# Altium PCB BalanceCar_pcb.PcbDoc (part 1 of 2)
Units mil, origin at the board's own origin, x right, y up, seen from the top; angles counter-clockwise.
Board outline 4685.52 x 2519.84 mil, 2 copper layers (Top Layer, Bottom Layer); 150 components, 131 nets, 624 pads, 420 vias.
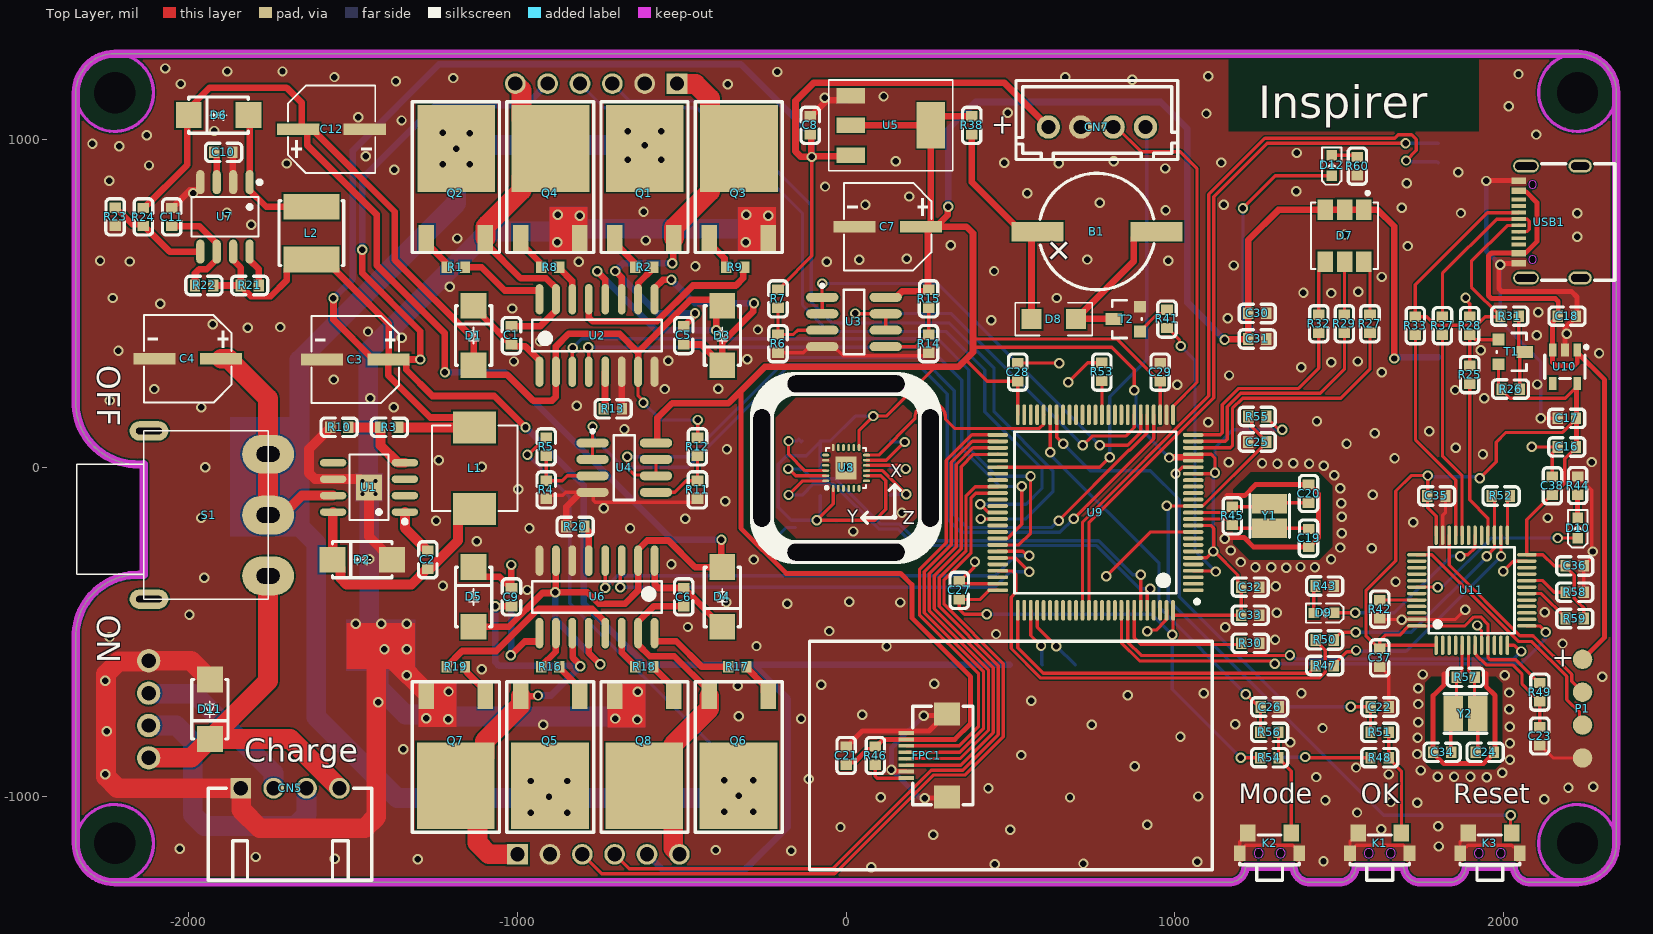
[diagram p0: Top Layer view]
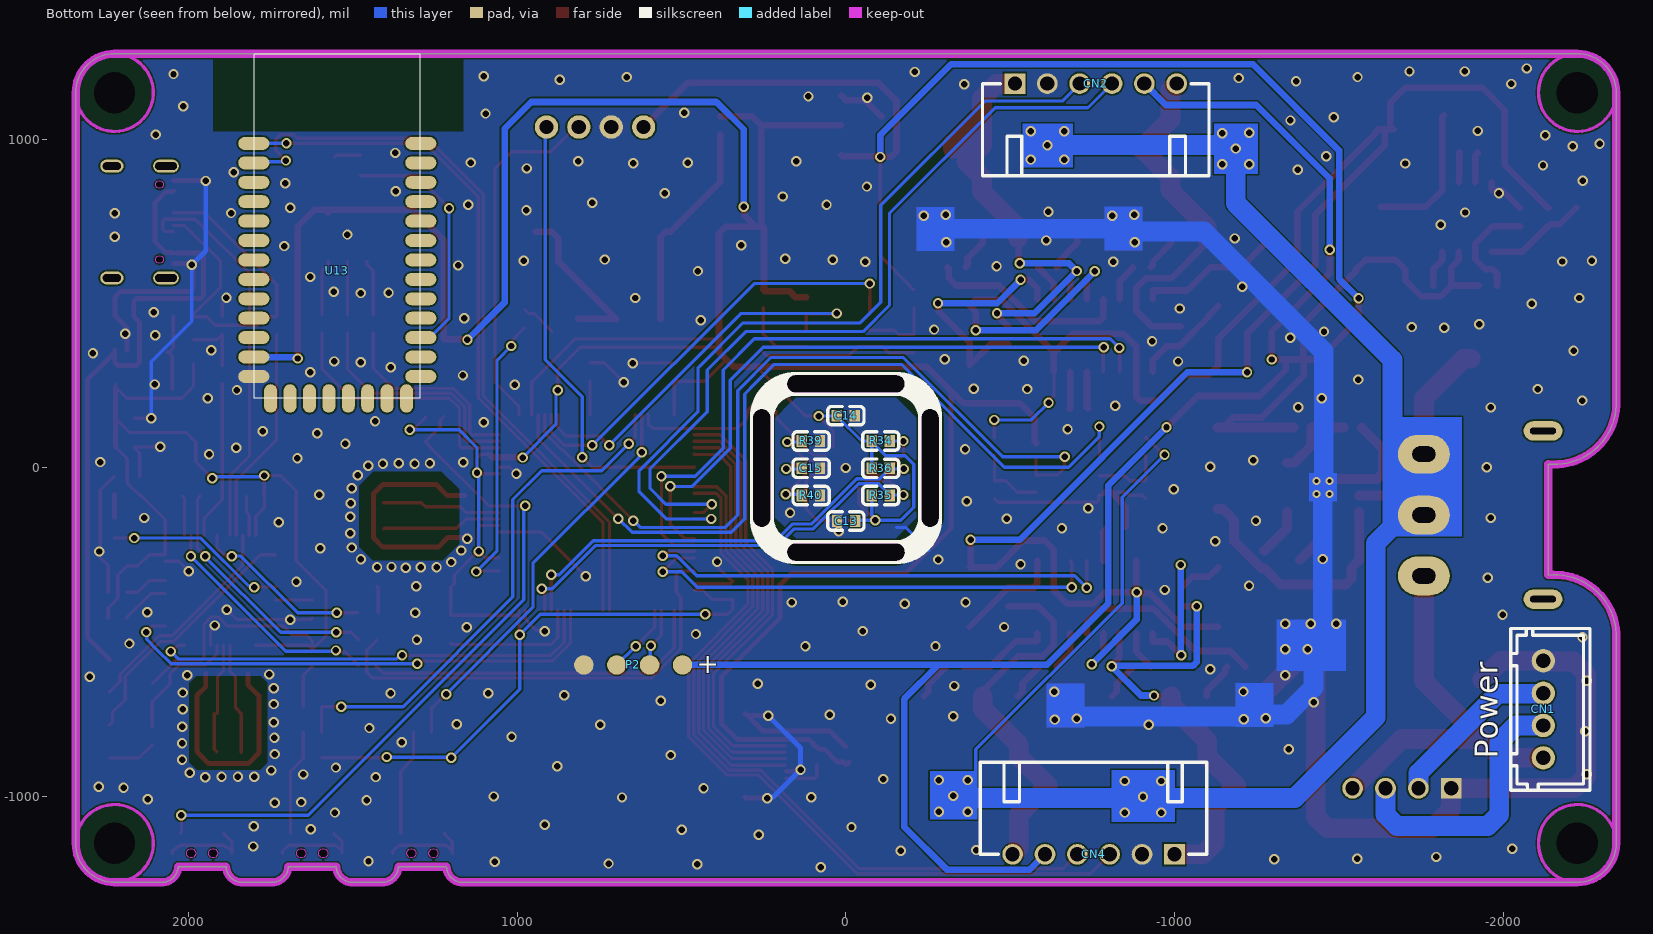
[diagram p1: Bottom Layer view, seen from below]

## Layer stack, top to bottom
Top Solder: solder mask 0.4, Solder Resist, Dk 3.5
Top Layer: signal copper 1.4
Dielectric 1: dielectric 12.6, FR-4, Dk 4.8
Bottom Layer: signal copper 1.4
Bottom Solder: solder mask 0.4, Solder Resist, Dk 3.5

## Board outline
-2342.52,-1141.73 ccw(c-2224.41,-1141.73) -2224.41,-1259.84 1162.84,-1259.84 1163,-1260 ccw(c1166,-1211) 1215.05,-1213.02 1215,-1213.02 1361,-1213.02 1360.95,-1213.02 ccw(c1410,-1211) 1413,-1260 1498,-1260 ccw(c1501,-1211) 1550.05,-1213.02 1550,-1213.02 1696,-1213.02 1695.95,-1213.02 ccw(c1745,-1211) 1748,-1260 1833,-1260 ccw(c1836,-1211) 1885.05,-1213.02 1885,-1213.02 2031,-1213.02 2030.95,-1213.02 ccw(c2080,-1211) 2083,-1260 2224.41,-1260 2224.41,-1259.84 ccw(c2224.41,-1141.73) 2342.52,-1141.73 2342.52,1141.73 ccw(c2224.41,1141.73) 2224.41,1259.84 -2224.41,1259.84 ccw(c-2224.41,1141.73) -2342.52,1141.73 -2342.52,190 -2343,190 ccw(c-2155,199) -2136.23,11.72 -2136.16,11 -2136.16,-325 -2136.23,-325.72 ccw(c-2155,-513) -2343,-504 -2342.52,-498.48
cut-out: -152.56,224.41 cw(c-152.56,255.91) -152.56,287.4 152.56,287.4 cw(c152.56,255.91) 152.56,224.41 151.57,224.41
cut-out: 224.41,-152.56 ccw(c255.91,-152.56) 287.4,-152.56 287.4,152.56 ccw(c255.91,152.56) 224.41,152.56 224.41,151.57
cut-out: -152.56,-287.4 cw(c-152.56,-255.91) -152.56,-224.41 -151.57,-224.41 151.57,-224.41 152.56,-224.41 cw(c152.56,-255.91) 152.56,-287.4
cut-out: -287.4,-152.56 ccw(c-255.91,-152.56) -224.41,-152.56 -224.41,-151.57 -224.41,151.57 -224.41,152.56 ccw(c-255.91,152.56) -287.4,152.56
cut-out: -287.4,-152.56 ccw(c-255.91,-152.56) -224.41,-152.56 -224.41,-151.57 -224.41,151.57 -224.41,152.56 ccw(c-255.91,152.56) -287.4,152.56

## Design rules (kind name [scope] priority, off if disabled: settings)
Clearance Polygon [InPolygon] p1: gap=5 ignorepadtopadclearanceinfootprint=FALSE
Clearance [All] p2: gap=5 ignorepadtopadclearanceinfootprint=FALSE
HoleSize 安装孔 [All] p1: absolutevalues=TRUE maxlimit=130 minlimit=1 maxpercent=80.000 minpercent=20.000
HoleSize [IsPad] p2: absolutevalues=TRUE maxlimit=100 minlimit=1 maxpercent=80.000 minpercent=20.000
PolygonConnect PolygonConnect_1 [All] p1: connectstyle=Direct reliefconductorwidth=10 reliefentries=4 polygonreliefangle="90 Angle" airgapwidth=10
PolygonConnect via [IsVia] p2: connectstyle=Direct reliefconductorwidth=10 reliefentries=4 polygonreliefangle="90 Angle" airgapwidth=10
RoutingVias [All] p1: holewidth=19.68 width=31.5 viastyle="Through Hole" minholewidth=19.68 minwidth=31.5 maxholewidth=19.68 maxwidth=31.5
SolderMaskExpansion [All] p1: expansion=4 istentingtop=FALSE
Width Width_1 [All] p1: maxlimit=60 minlimit=10 preferedwidth=10
Width PIC5V [InNet('PIC5V')] p2: maxlimit=20 minlimit=10 preferedwidth=20
Width 3.3V [InNet('3.3V')] p3: maxlimit=30 minlimit=10 preferedwidth=30
29 further rules are at their usual default settings.

## Components (designator, comment, footprint, x,y, rotation, side; value= is the part's Value field where it differs from the comment)
B1 "GSC9045YB-16R2700" BUZ-SMD_GSC9045YB-16R2700 763,719 r90 top
C1 "1uF" 0603-JLC-C -1017.52,375.59 r180 top value=100pF
C2 "0.01uf" 0603-JLC-C -1272,-306.25 r180 top
C3 "220uF/16V" SMD,6.3X5.3MM -1492,334 r180 top
C4 "220uF/25V" SMD,6.3X5.8MM -1900.64,332 r180 top
C5 "1uF" 0603-JLC-C -493.72,375.59 r180 top value=100pF
C6 "1uF" 0603-JLC-C -493.93,-364.91 r0 top value=100pF
C7 "100uF/16V" SMD,6.3X5.3MM 127,738 r180 top
C8 "104" 0603-JLC-C -109.16,1069.31 r0 top value=0.1uf
C9 "1uF" 0603-JLC-C -1017.73,-364.91 r0 top value=100pF
C10 "100pF" 0603-JLC-C -1866,960 r270 top value=470pF
C11 "104" 0603-JLC-C -2051,790.86 r0 top value=470pF
C12 "220uF/25V" SMD,6.3X5.8MM -1666,1030 r0 top
C13 "0.01uF" 0603-JLC-C 27.25,-161.46 r90 bottom value=100pF
C14 "104" 0603-JLC-C -27.25,159.32 r270 bottom value=100pF
C15 "104" 0603-JLC-C 78.74,-0.8 r270 bottom value=100pF
C16 "1uF" 0603-JLC-C 2164.67,63.84 r90 top value=100pF
C17 "104" 0603-JLC-C 2164.67,150.84 r90 top value=100pF
C18 "1uF" 0603-JLC-C 2219.78,461.84 r270 top value=100pF
C19 "20pF" 0603-JLC-C 1406.62,-240.53 r180 top value=100pF
C20 "20pF" 0603-JLC-C 1406.4,-50.37 r0 top value=100pF
C21 "104" 0603-JLC-C 0,-847.19 r0 top value=100pF
C22 "104" 0603-JLC-C 1595.7,-727 r90 top value=100pF
C23 "104" 0603-JLC-C 2109.79,-787.89 r0 top value=100pF
C24 "20pF" 0603-JLC-C 1970.63,-864.63 r270 top value=104
C25 "104" 0603-JLC-C 1277.73,79 r270 top value=100pF
C26 "104" 0603-JLC-C 1260.7,-727 r90 top value=100pF
C27 "104" 0603-JLC-C 344,-345 r0 top value=100pF
C28 "104" 0603-JLC-C 522,319 r0 top value=100pF
C29 "104" 0603-JLC-C 955,319 r0 top value=100pF
C30 "104" 0603-JLC-C 1277.73,470.13 r270 top value=100pF
C31 "104" 0603-JLC-C 1277.73,392.38 r270 top value=100pF
C32 "104" 0603-JLC-C 1256.56,-362.26 r270 top value=100pF
C33 "104" 0603-JLC-C 1256.56,-447.63 r270 top value=100pF
C34 "20pF" 0603-JLC-C 1785.41,-864.84 r90 top value=104
C35 "104" 0603-JLC-C 1823.11,-85 r270 top value=100pF
C36 "104" 0603-JLC-C 2243.3,-297.84 r270 top value=100pF
C37 "104" 0603-JLC-C 1623.06,-605.11 r180 top value=100pF
C38 "104" 0603-JLC-C 2148,-26.89 r0 top value=100pF
CN1 "BAT_4P" CONN-TH_4P-P2.50_HX25003-4A -2121,-734 r90 bottom
CN2 "Motor1" CONN-TH_6P-P2.50_X8821WR-06S-N2SN -760,1169 r180 bottom
CN4 "Motor2" CONN-TH_6P-P2.50_X8821WR-06S-N2SN -753.06,-1175 r0 bottom
CN5 "Charge" CONN-TH_4P-P2.54_X8821WR-06S-N2SN -1841,-974 r0 top
CN7 "LiDAR" CONN-TH_4P-P2.50_HX25003-4A 763,1037 r180 top
D1 "SS34" SMA(DO-214AC) -1133,493.39 r270 top
D2 "SS34" SMA(DO-214AC) -1562,-279 r0 top
D3 "SS34" SMA(DO-214AC) -376.5,312.29 r90 top
D4 "SS34" SMA(DO-214AC) -376.5,-482.71 r90 top
D5 "SS34" SMA(DO-214AC) -1133,-301.61 r270 top
D6 "SS34" SMA(DO-214AC) -1999,1073 r0 top
D7 "RGB5050" LED-SMD_6P-L5.0-W5.0-FD 1516,706.21 r270 top
D8 "1N4148" 1206 699,453 r180 top
D9 "LED" 0603LED 1484.97,-440.72 r180 top
D10 "LED" 0603LED 2225.27,-214.11 r90 top
D11 "SMAJ15A" SMA(DO-214AC) -1935,-824.55 r90 top
D12 "LED" 0603LED 1477.28,888.48 r90 top
FPC1 "AFC24-S08FIC-00" FPC-SMD_P0.50-8P-QCHF-SM-H2.0 245.5,-874.44 r270 top
K1 "TS24CA" SW-SMD_TS24CA 1623,-1141 r180 top
K2 "TS24CA" SW-SMD_TS24CA 1288,-1141 r180 top
K3 "TS24CA" SW-SMD_TS24CA 1958,-1141 r180 top
L1 "15UH" IND-SMD_L7.1-W6.6 -1130,-1 r90 top
L2 "150uH" IND-SMD_L5.0-W5.0_SMNR5040 -1626,714 r90 top value=100uH
P1 "ST_SWD" HDR1X4 2240,-882 r90 top
P2 "ISP" HDR1X4 797,-599 r180 bottom
Q1 "RU3560L" TO-252-3L -613.19,835.84 r0 top
Q2 "RU3560L" TO-252-3L -1186.52,835.84 r0 top
Q3 "RU3560L" TO-252-3L -326.52,835.84 r0 top
Q4 "RU3560L" TO-252-3L -899.85,835.84 r0 top
Q5 "RU3560L" TO-252-3L -899.85,-830.16 r180 top
Q6 "RU3560L" TO-252-3L -326.52,-830.16 r180 top
Q7 "RU3560L" TO-252-3L -1186.52,-830.16 r180 top
Q8 "RU3560L" TO-252-3L -613.19,-830.16 r180 top
R1 "33R" 0603-RMOS -1214.07,610 r90 top value=1K
R2 "33R" 0603-RMOS -585.63,610 r270 top value=1K
R3 "10k" 0603-JLC-R -1416.27,123.52 r90 top
R4 "1K" 0603-JLC-R -912,-94 r180 top
R5 "10K" 0603-JLC-R -912,37 r180 top value=1K
R6 "1K" 0603-JLC-R -207.03,350.89 r180 top
R7 "10K" 0603-JLC-R -207.03,486.89 r180 top value=1K
R8 "33R" 0603-RMOS -927.41,610 r90 top value=1K
R9 "33R" 0603-RMOS -309,610 r270 top value=1K
R10 "3.24k" 0603-JLC-R -1569.27,123.52 r90 top
R11 "1K" 0603-JLC-R -452,-94 r180 top
R12 "10K" 0603-JLC-R -452,37 r180 top value=1K
R13 "10K" 0603-JLC-R -681.39,180.06 r270 top value=1K
R14 "1K" 0603-JLC-R 251,350.89 r180 top
R15 "10K" 0603-JLC-R 251,486.89 r180 top value=1K
R16 "33R" 0603-RMOS -927.41,-605 r90 top value=1K
R17 "33R" 0603-RMOS -303,-605 r270 top value=1K
R18 "33R" 0603-RMOS -585.63,-605 r270 top value=1K
R19 "33R" 0603-RMOS -1214.07,-605 r90 top value=1K
R20 "10K" 0603-JLC-R -851.11,-178 r90 top value=1K
R21 "200R" 0603-JLC-R -1841,555 r90 top value=181
R22 "1R" 0603-JLC-R -1980.11,555 r90 top value=181
R23 "1.5K" 0603-JLC-R -2223,736.36 r180 top value=1k
R24 "13K" 0603-JLC-R -2137,790.86 r0 top value=10k
R25 "1.5K" 0603-JLC-R 1896.48,310.95 r0 top
R26 "0R/NC" 0603-JLC-R 1993.48,239.84 r90 top
R27 "200R" 0603-JLC-R 1593.34,411.23 r180 top value=1K
R28 "1.5K/NC" 0603-JLC-R 1896.48,405.73 r180 top
R29 "200R" 0603-JLC-R 1515.59,411.23 r180 top value=1K
R30 "10K" 0603-JLC-R 1256.56,-533 r270 top value=1K
R31 "1.5K" 0603-JLC-R 2045.59,461.84 r270 top
R32 "200R" 0603-JLC-R 1437.84,411.23 r180 top value=1K
R33 "22R" 0603-JLC-R 1731,460.23 r0 top
R34 "10K" 0603-JLC-R -133.24,82.06 r270 bottom
R35 "10K" 0603-JLC-R -133.24,-83.66 r270 bottom
R36 "10K" 0603-JLC-R -133.24,-0.8 r270 bottom
R37 "22R" 0603-JLC-R 1813.63,460.23 r0 top
R38 "51R" 0603-JLC-R 382,1069.31 r0 top value=1K
R39 "10K" 0603-JLC-R 78.74,82.06 r270 bottom
R40 "10K" 0603-JLC-R 78.74,-83.66 r270 bottom
R41 "1K" 0603-JLC-R 976,425.75 r180 top
R42 "10K" 0603-JLC-R 1622.84,-401.89 r0 top
R43 "10K" 0603-JLC-R 1482.7,-359 r270 top
R44 "10K" 0603-JLC-R 2224.81,-26.05 r0 top
R45 "1MΩ" 0603-JLC-R 1174.47,-118.2 r0 top value=1K
R46 "10R" 0603-JLC-R 89,-847.19 r0 top
R47 "100R" 0603-JLC-R 1428.2,-601 r90 top
R48 "10K" 0603-JLC-R 1650.2,-881 r270 top value=1K
R49 "10K" 0603-JLC-R 2110,-709.11 r180 top
R50 "100R" 0603-JLC-R 1428.2,-523 r90 top
R51 "1K" 0603-JLC-R 1650.2,-803.89 r270 top
R52 "100R" 0603-JLC-R 2019.11,-85 r270 top
R53 "10K" 0603-JLC-R 778,264.5 r180 top value=1K
R54 "10K" 0603-JLC-R 1315.2,-881 r270 top value=1K
R55 "10K" 0603-JLC-R 1223.23,156.53 r90 top value=1K
R56 "1K" 0603-JLC-R 1315.2,-803.89 r270 top
R57 "1MΩ" 0603-JLC-R 1856.41,-636.86 r90 top
R58 "10K" 0603-JLC-R 2243.3,-377.84 r270 top
R59 "10K" 0603-JLC-R 2243.3,-457.84 r270 top
R60 "10K" 0603-JLC-R 1555,890.75 r180 top
S1 "开关" 拨动电源开关 -1757.8,-328.13 r90 top
T1 "SS8550" SOT-23 1984.48,389.84 r270 top
T2 "SS8050" SOT-23 893.85,416.01 r90 top
U1 "TPS5430DDAR" SOIC-8_L5.0-W4.0-P1.27-LS6.0-BL-EP2.0 -1451,-59 r90 top
U2 "HIP4082" HIP4082B -757.52,402.84 r90 top
U3 "OPA2350" SOP_8 24,444 r0 top
U4 "OPA2350" SOP_8 -674.5,1.06 r0 top
U5 "1117-3.3" SOT223 13.84,1132.61 r270 top
U6 "HIP4082" HIP4082B -757.52,-392.16 r270 top
U7 "MC34063" SOP-8_L4.9-W3.9-P1.27-LS6.0-BL -1889,763.61 r180 top
U8 "MPU9250" "QFN24 4X4" 0,0 r0 top
U9 "GD32F450VIT6" LQFP-100_L14.0-W14.0-P0.50-LS16.0-BL 758.36,-135.51 r90 top
U10 "ME6212C33M5G" ME6212C33M5G 2186.32,307.84 r270 top
U11 "STM32F103C8T6" STM32F103C6T6 1903,-372 r0 top
U13 "BT04-E01" BT04-E02 1800.87,987 r90 bottom
USB1 "TYPE-C-31-M-31" USB-C-SMD_TYPE-C-31-M-31 2139,748 r90 top
Y1 "8MHz" 3225 1288.32,-145.78 r270 top
Y2 "8M" 3225 1883.66,-746.84 r180 top

## Footprints (in the part's own frame and the unit in brackets; to place one, negate y for a bottom-side part, rotate by r counter-clockwise, add the part's x,y. Pads: shape width x height; smd on the part's side, far side on the other; paste and mask are expansions set on the pad)
0603-JLC-C [mm]
  rect 0.9x0.8 smd: 1(0,0) 2(0,-1.4)
  silkscreen extent -0.71,-2.09 0.72,0.71
0603-JLC-R [mm]
  rect 0.9x0.8 smd: 1(0,0) 2(0,-1.4)
  silkscreen extent -0.71,-2.09 0.72,0.71
0603-RMOS [mm]
  rect 0.9x0.8 smd: 1(0,0) 2(0,-1.4)
0603LED [mm]
  rect 0.8x0.8 smd: 1(0,0) 2(1.599,0.007)
  silkscreen extent -0.69,-0.74 2.19,0.76
1206 [mil]
  rect 60x60 smd: 1(0,0) 2(135,0)
  silkscreen extent -50,-50 185,50
3225 [mm]
  rect 1.5x2.7 smd: 1(-0.95,0) 2(0.95,0)
  silkscreen extent -1.65,-1.52 1.65,1.52
BT04-E02 [mm]
  oval 1x2.4 smd: 1(0,0) 2(-1.5,0) 3(-3,0) 4(-4.5,0) 5(-6,0) 6(-7.5,0) 7(-9,0) 8(-10.5,0) 9(-12,0) 10(-13.5,0) 11(-15,0) 12(-16.5,0) 13(-18,0) 22(-18,-12.9) 23(-16.5,-12.9) 24(-15,-12.9) 25(-13.5,-12.9) 26(-12,-12.9) 27(-10.5,-12.9) 28(-9,-12.9) 29(-7.5,-12.9) 30(-6,-12.9) 31(-4.5,-12.9) 32(-3,-12.9) 33(-1.5,-12.9) 34(0,-12.9)
  oval 2.2x1 smd: 14(-19.7,-1.3) 15(-19.7,-2.8) 16(-19.7,-4.3) 17(-19.7,-5.8) 18(-19.7,-7.3) 19(-19.7,-8.8) 20(-19.7,-10.3) 21(-19.7,-11.8)
  silkscreen extent -19.7,-12.85 6.9,-0.05
BUZ-SMD_GSC9045YB-16R2700 [mm]
  rect 1.5x4 smd: 1(0,4.6) 2(0,-4.6)
  silkscreen extent -4.5,-4.4 4.5,4.4
CONN-TH_4P-P2.50_HX25003-4A [mm]
  round 1.8 hole 1.1 mask+0.051: 1(-3.75,0) 2(-1.25,0) 3(1.25,0) 4(3.75,0)
  silkscreen extent -6.25,-3.6 6.25,2.51
CONN-TH_4P-P2.54_X8821WR-06S-N2SN [mm]
  rect 1.6x1.6 hole 1.1: 1(0,0)
  round 1.6 hole 1.1: 2(2.54,0) 3(5.08,0) 4(7.62,0)
  silkscreen extent -2.5,-7.11 10.12,0
CONN-TH_6P-P2.50_X8821WR-06S-N2SN [mm]
  rect 1.6x1.6 hole 1.1: 1(-6.25,0)
  round 1.6 hole 1.1: 2(-3.75,0) 3(-1.25,0) 4(1.25,0) 5(3.75,0) 6(6.25,0)
  silkscreen extent -8.75,-7.11 8.75,0
FPC-SMD_P0.50-8P-QCHF-SM-H2.0 [mm]
  rect 0.3x1.2 smd mask+0.05: 1(1.75,-1.575) 2(1.25,-1.575) 3(0.75,-1.575) 4(0.25,-1.575) 5(-0.25,-1.575) 6(-0.75,-1.575) 7(-1.25,-1.575) 8(-1.75,-1.575)
  rect 1.8x2 smd mask+0.05: 9(3.2,1.575) 10(-3.2,1.575)
  silkscreen extent -3.8,-1.08 3.8,3.57
HDR1X4 [mm] "Connector; Header; 4 Position"
  round 1.5 smd: 1(0,0) 2(2.54,0) 3(5.08,0) 4(7.62,0)
HIP4082B [mm]
  oval 2.35x0.6 smd: 1(-2.8,4.445) 2(-2.8,3.175) 3(-2.8,1.905) 4(-2.8,0.635) 5(-2.8,-0.635) 6(-2.8,-1.905) 7(-2.8,-3.175) 8(-2.8,-4.445) 9(2.8,-4.445) 10(2.8,-3.175) 11(2.8,-1.905) 12(2.8,-0.635) 13(2.8,0.635) 14(2.8,1.905) 15(2.8,3.175) 16(2.8,4.445)
  silkscreen extent -1.22,-5 1.23,5
IND-SMD_L5.0-W5.0_SMNR5040 [mil]
  rect 78.7x169.3 smd mask+2: 1(-80.5,0) 2(80.5,0)
  silkscreen extent -98,-98 98,98
IND-SMD_L7.1-W6.6 [mm]
  rect 2.474x3.32 smd: 1(3.153,0) 2(-3.153,0)
  silkscreen extent -3.3,-3.3 3.3,3.3
LED-SMD_6P-L5.0-W5.0-FD [mm]
  rect 1.6x1.2 smd: 1(-2.001,1.5) 2(-2.001,0) 3(-2.001,-1.5) 4(2.001,-1.5) 5(2.001,0) 6(2.001,1.5)
  silkscreen extent -3.43,-2.58 2.58,2.58
LQFP-100_L14.0-W14.0-P0.50-LS16.0-BL [mm]
  oval 0.3x1.6 smd: 1(-6,-7.55) 2(-5.5,-7.55) 3(-5,-7.55) 4(-4.5,-7.55) 5(-4,-7.55) 6(-3.5,-7.55) 7(-3,-7.55) 8(-2.5,-7.55) 9(-2,-7.55) 10(-1.5,-7.55) 11(-1,-7.55) 12(-0.5,-7.55) 13(0,-7.55) 14(0.5,-7.55) 15(1,-7.55) 16(1.5,-7.55) 17(2,-7.55) 18(2.5,-7.55) 19(3,-7.55) 20(3.5,-7.55) 21(4,-7.55) 22(4.5,-7.55) 23(5,-7.55) 24(5.5,-7.55) 25(6,-7.55) 51(6,7.55) 52(5.5,7.55) 53(5,7.55) 54(4.5,7.55) 55(4,7.55) 56(3.5,7.55) 57(3,7.55) 58(2.5,7.55) 59(2,7.55) 60(1.5,7.55) 61(1,7.55) 62(0.5,7.55) 63(0,7.55) 64(-0.5,7.55) 65(-1,7.55) 66(-1.5,7.55) 67(-2,7.55) 68(-2.5,7.55) 69(-3,7.55) 70(-3.5,7.55) 71(-4,7.55) 72(-4.5,7.55) 73(-5,7.55) 74(-5.5,7.55) 75(-6,7.55)
  oval 1.6x0.3 smd: 26(7.55,-6) 27(7.55,-5.5) 28(7.55,-5) 29(7.55,-4.5) 30(7.55,-4) 31(7.55,-3.5) 32(7.55,-3) 33(7.55,-2.5) 34(7.55,-2) 35(7.55,-1.5) 36(7.55,-1) 37(7.55,-0.5) 38(7.55,0) 39(7.55,0.5) 40(7.55,1) 41(7.55,1.5) 42(7.55,2) 43(7.55,2.5) 44(7.55,3) 45(7.55,3.5) 46(7.55,4) 47(7.55,4.5) 48(7.55,5) 49(7.55,5.5) 50(7.55,6) 76(-7.55,6) 77(-7.55,5.5) 78(-7.55,5) 79(-7.55,4.5) 80(-7.55,4) 81(-7.55,3.5) 82(-7.55,3) 83(-7.55,2.5) 84(-7.55,2) 85(-7.55,1.5) 86(-7.55,1) 87(-7.55,0.5) 88(-7.55,0) 89(-7.55,-0.5) 90(-7.55,-1) 91(-7.55,-1.5) 92(-7.55,-2) 93(-7.55,-2.5) 94(-7.55,-3) 95(-7.55,-3.5) 96(-7.55,-4) 97(-7.55,-4.5) 98(-7.55,-5) 99(-7.55,-5.5) 100(-7.55,-6)
  silkscreen extent -7.03,-8 6.25,6.25
ME6212C33M5G [mm]
  rect 1x0.6 smd: 1(-1.3,0.95) 2(-1.3,0) 3(-1.3,-0.95) 4(1.3,-0.95) 5(1.3,0.95)
  silkscreen extent -1.65,-1.55 0.9,1.78
"QFN24 4X4" [mm]
  oval 0.2x0.55 smd: 1(-1,-1.575) 2(-0.6,-1.575) 3(-0.2,-1.575) 4(0.2,-1.575) 5(0.6,-1.575) 6(1,-1.575) 13(1,1.575) 14(0.6,1.575) 15(0.2,1.575) 16(-0.2,1.575) 17(-0.6,1.575) 18(-1,1.575)
  oval 0.55x0.2 smd: 7(1.575,-1) 8(1.575,-0.6) 9(1.575,-0.2) 10(1.575,0.2) 11(1.575,0.6) 12(1.575,1) 19(-1.575,1) 20(-1.575,0.6) 21(-1.575,0.2) 22(-1.575,-0.2) 23(-1.575,-0.6) 24(-1.575,-1)
  rect 1.6x1.8 smd: 18(0,0)
  silkscreen extent -1.6,-1.62 1.55,1.55
SMA(DO-214AC) [mm]
  rect 2x2 smd: 1(0,0) 2(4.6,0)
  silkscreen extent 0,-1.4 4.6,1.4
SMD,6.3X5.3MM [mm]
  rect 3.26x0.91 smd: 1(-2.554,0.104) 2(2.586,0.104)
  silkscreen extent -3.36,-3.27 3.39,3.48
SMD,6.3X5.8MM [mm]
  rect 3.26x0.91 smd: 1(0,0) 2(5.14,0)
  silkscreen extent -0.81,-3.38 5.95,3.38
SOIC-8_L5.0-W4.0-P1.27-LS6.0-BL-EP2.0 [mil]
  oval 22.6x80.24 smd: 1(-75,-109.02) 2(-25,-109.02) 3(25,-109.02) 4(75,-109.02) 5(75,109.02) 6(25,109.02) 7(-25,109.02) 8(-75,109.02)
  rect 78.74x78.74 smd: 9(0,0)
  silkscreen extent -110,-115 99,60
SOP-8_L4.9-W3.9-P1.27-LS6.0-BL [mm]
  oval 0.63x1.865 smd mask+0.051: 1(-1.905,-2.682) 2(-0.635,-2.682) 3(0.635,-2.682) 4(1.905,-2.682) 5(1.905,2.682) 6(0.635,2.682) 7(-0.635,2.682) 8(-1.905,2.682)
  silkscreen extent -2.82,-2.83 2.58,1.52
SOP_8 [mm] "SOIC, 8-Leads, Body 5.3x5.4mm (max), Pitch 1.27mm, IPC Medium Density"
  oval 2.5x0.7 smd: 1(-2.45,1.905) 2(-2.45,0.635) 3(-2.45,-0.635) 4(-2.45,-1.905) 5(2.45,-1.905) 6(2.45,-0.635) 7(2.45,0.635) 8(2.45,1.905)
  silkscreen extent -2.57,-2.5 0.8,2.93
SOT223 [mm]
  rect 1.2x2.2 smd: 1(0,0) 2(2.3,0) 3(4.6,0)
  rect 3.6x2.2 smd: 4(2.3,6.2)
  silkscreen extent -1.2,-1.7 5.8,7.9
SOT-23 [mil]
  rect 36x36 smd: 1(-0.51,-0.15) 2(74.49,-0.15)
  rect 36x50 smd: 3(37.49,79.85)
  silkscreen extent -21,-5 94,85
STM32F103C6T6 [mm]
  oval 0.27x1.5 smd: 1(-2.75,-4.25) 2(-2.25,-4.25) 3(-1.75,-4.25) 4(-1.25,-4.25) 5(-0.75,-4.25) 6(-0.25,-4.25) 7(0.25,-4.25) 8(0.75,-4.25) 9(1.25,-4.25) 10(1.75,-4.25) 11(2.25,-4.25) 12(2.75,-4.25) 25(2.75,4.25) 26(2.25,4.25) 27(1.75,4.25) 28(1.25,4.25) 29(0.75,4.25) 30(0.25,4.25) 31(-0.25,4.25) 32(-0.75,4.25) 33(-1.25,4.25) 34(-1.75,4.25) 35(-2.25,4.25) 36(-2.75,4.25)
  oval 1.5x0.27 smd: 13(4.25,-2.75) 14(4.25,-2.25) 15(4.25,-1.75) 16(4.25,-1.25) 17(4.25,-0.75) 18(4.25,-0.25) 19(4.25,0.25) 20(4.25,0.75) 21(4.25,1.25) 22(4.25,1.75) 23(4.25,2.25) 24(4.25,2.75) 37(-4.25,2.75) 38(-4.25,2.25) 39(-4.25,1.75) 40(-4.25,1.25) 41(-4.25,0.75) 42(-4.25,0.25) 43(-4.25,-0.25) 44(-4.25,-0.75) 45(-4.25,-1.25) 46(-4.25,-1.75) 47(-4.25,-2.25) 48(-4.25,-2.75)
  silkscreen extent -3.33,-3.31 3.3,3.34
SW-SMD_TS24CA [mil]
  rect 35.4x47.2 smd mask+2: 1(-90.5,30.5) 2(90.6,30.5)
  rect 47.2x51.2 smd mask+2: 3(-65.9,-30.5) 4(66,-30.5)
  Keep-Out Layer board cut-out: -19.7,30.5 -19.7,33.24 -21.8,38.32 -25.68,42.2 -30.76,44.3 -36.24,44.3 -41.32,42.2 -45.2,38.32 -47.3,33.24 -47.3,30.5 -47.3,27.76 -45.2,22.68 -41.32,18.8 -36.24,16.7 -30.76,16.7 -25.68,18.8 -21.8,22.68 -19.7,27.76 -19.7,30.5 -19.7,30.5
  Keep-Out Layer board cut-out: 47.3,30.5 47.3,33.24 45.2,38.32 41.32,42.2 36.24,44.3 30.76,44.3 25.68,42.2 21.8,38.32 19.7,33.24 19.7,30.5 19.7,27.76 21.8,22.68 25.68,18.8 30.76,16.7 36.24,16.7 41.32,18.8 45.2,22.68 47.3,27.76 47.3,30.5 47.3,30.5
  silkscreen extent -91,-25 91,113
TO-252-3L [mm]
  rect 1.2x2 smd: 1(-2.28,-3.457) 3(2.28,-3.457)
  rect 6x6.7 smd: 2(0.02,3.457)
  silkscreen extent -3.37,-4.58 3.36,7.06
USB-C-SMD_TYPE-C-31-M-31 [mil]
  oval 39.4x70.9 hole 23.6 slot 55.1 at 90 deg mask+2: 1(-170.1,-93.5) 1(170.1,-93.5)
  oval 39.4x78.7 hole 23.6 slot 66.9 at 90 deg mask+2: 1(-170.1,71.1) 1(170.1,71.1)
  rect 19.7x44.9 smd mask+2: A1(-126,93.4) A4(-94.5,93.4) A9(94.5,93.4) A12(126,93.4)
  rect 11.8x44.9 smd mask+2: A5(-49.2,93.4) A6(-9.8,93.4) A7(9.8,93.4) A8(49.2,93.5) B5(68.9,93.4) B6(29.5,93.4) B7(-29.5,93.4) B8(-68.9,93.5)
  Keep-Out Layer board cut-out: 125.6,51.4 125.6,53.75 123.8,58.08 120.48,61.4 116.15,63.2 111.45,63.2 107.12,61.4 103.8,58.08 102,53.75 102,51.4 102,49.05 103.8,44.72 107.12,41.4 111.45,39.6 116.15,39.6 120.48,41.4 123.8,44.72 125.6,49.05 125.6,51.4 125.6,51.4
  Keep-Out Layer board cut-out: -102,51.4 -102,53.75 -103.8,58.08 -107.12,61.4 -111.45,63.2 -116.15,63.2 -120.48,61.4 -123.8,58.08 -125.6,53.75 -125.6,51.4 -125.6,49.05 -123.8,44.72 -120.48,41.4 -116.15,39.6 -111.45,39.6 -107.12,41.4 -103.8,44.72 -102,49.05 -102,51.4 -102,51.4
  silkscreen extent -177,-199 177,24
拨动电源开关 [mm]
  oval 1.5x3 hole 0.5 slot 2 at 90 deg: 0(-1.8,9.2) 0(11.2,9.2)
  oval 3x4 hole 1.2 slot 1.8 at 90 deg: 1(0,0) 2(4.7,0) 3(9.4,0)
  silkscreen extent -1.8,0 11.2,14.77

## Part data
B1: "无源蜂鸣器", BOM_JLCPCB Part Class="Extended Part", BOM_Manufacturer=INGHAi, Frequency=2700Hz, BOM_Manufacturer Part=GSC9045YB-16R2700, BOM_Supplier=LCSC, BOM_Supplier Part=C255324, Contributor=LCSC, spicePre=B, spiceSymbolName=GSC9045YB-16R2700
C1 C5 C6 C8 C9 C13 C14 C15 C16 C17 C18 C19 C20 C21 C22 C23 C24 C25 C26 C27 C28 C29 C30 C31 C32 C33 C34 C35 C36 C37 C38: library part Cap, "C0603", LatestRevisionDate=17-Jul-2002, LatestRevisionNote="Re-released for DXP Platform.", Published=8-Jun-2000, Publisher="Altium Limited"
  C1 C5 C6 C8 C9 C13 C14 C15 C16 C17 C18 C19 C20 C21 C22 C23 C25 C26 C27 C28 C29 C30 C31 C32 C33 C35 C36 C37 C38: PackageDescription="Radial Cap, Thru-Hole; 2 Leads; 0.3 in Pin Spacing", PackageReference=RAD-0.3
C2: library part 普通电容, "C0603"
C3 C7: library part SMD_ECAP, "6.3*5.3mm铝电解电容"
C4 C12: library part CAP极性, "贴片铝电解电容SMD,6.3x5.8mm"
C10 C11: library part CAP_0805
CN1 CN5 CN7: library part "Header 4", "卧式XH2.54 4P", LatestRevisionDate=17-Jul-2002, LatestRevisionNote="Re-released for DXP Platform.", Publisher="Altium Limited"
CN2 CN4: library part Motor, "卧式XH2.54 6P"
D1 D2 D3 D4 D5 D6: library part "DIODE SCHOTTKY", "肖特基二极管"
D7: "5050灯珠"
D8: library part DIODE, "Diode"
D9 D10 D12: library part LED3, "0603白色LED", DatasheetVersion=16-Apr-2002, LatestRevisionDate=17-Dec-2003, LatestRevisionNote="PCB Footprint replaced.", PackageDescription="SM LED; 2 C-Bend Leads; Body 3.5 x 2.8 x 1.9 mm, inc leads (LxWxH typ)", PackageReference=3.5X2.8X1.9, PackageVersion=16-Apr-2002, Published=8-Jun-2000, Publisher="Altium Limited"
D11: library part "DIODE ZENER", "单向TVS管"
FPC1: "间距:0.5mm;触点数量:8;锁定特性:翻盖式;安装类型:卧贴;触点类型:双侧触点/上下接;", JLCPCB Part Class="Extended Part", LCSC Part Name="0.5mm P数:8 翻盖式 双侧触点/上下接 前插后翻 镀金", Manufacturer=JS(钜硕电子), Add into BOM=yes, Contact Type=双侧触点/上下接, Convert to PCB=yes, Datasheet=https://atta.szlcsc.com/upload/public/pdf/source/20180814/C262288_3EA2E7FD5EA0EEBDC908165C192842F4.pdf, Device=AFC24-S08FIC-00, FFC, FCB Thickness=0.3mm, Height Above Board=2mm, Locking Feature=翻盖式, Manufacturer Part=AFC24-S08FIC-00, Mounting Type=卧贴, Name=AFC24-S08FIC-00, Number of Contacts=8, Pitch=0.5mm, Supplier=LCSC, Supplier Footprint=SMD,P=0.5mm, Supplier Part=C262288, Symbol=AFC24-S08FIC-00
K1 K2 K3: Contact Current=50mA, JLCPCB Part Class="Extended Part", LCSC Part Name=2*4*3.5半包小贝贝TS-018小侧按键m165蓝牙耳机轻触开关, Manufacturer="SHOU HAN(首韩)", Voltage Rating (DC)=12V, Actuator Style=矩形按钮, Add into BOM=yes, Circuit=单刀单掷, Convert to PCB=yes, Datasheet=https://atta.szlcsc.com/upload/public/pdf/source/20190521/C393942_591A9E318887EFA4274D34029981AD99.pdf, Device=TS24CA, Manufacturer Part=TS24CA, Mounting Style=卧贴, Name=TS24CA, Supplier=LCSC, Supplier Footprint=SMD, Supplier Part=C393942, Switch Height=3.5mm, Switch Length=4.55mm, Switch Width=1.8mm, Symbol=TS24CA, With Lamp=-
L1: library part L, "一体成型功率电感"
L2: library part Inductor, "Inductor", Code_IEC=1005, Code_JEITA=0402, LatestRevisionDate=17-Jul-2002, LatestRevisionNote="Re-released for DXP Platform.", PackageReference=0402-A, Published=8-Jun-2000, Publisher="Altium Limited"
P1 P2: library part "Header 4", "Header, 4-Pin", LatestRevisionDate=17-Jul-2002, LatestRevisionNote="Re-released for DXP Platform.", Publisher="Altium Limited"
Q1 Q2 Q3 Q4 Q5 Q6 Q7 Q8: library part IRFR1205, "NMOSFET", Manufacturer="International Rectifier", Package Reference=TO-252AA, Class I=Discrete, Class II="MOSFET - Power", Datasheet="Latest Revision: PD-91318B", Note="Pin 2 is trimmed and is electrically connected to Drain.", Published=8-Jun-2000, Publisher="Altium Limited", Revision="July-2002: Re-released for DXP Platform."
R1 R2 R4 R5 R6 R7 R8 R9 R11 R12 R13 R14 R15 R16 R17 R18 R19 R20 R25 R26 R27 R28 R29 R30 R31 R32 R33 R34 R35 R36 R37 R38 R39 R40 R41 R42 R43 R44 R45 R46 R47 R48 R49 R50 R51 R52 R53 R54 R55 R56 R57 R58 R59 R60: library part Res2, "R0603", LatestRevisionDate=17-Jul-2002, LatestRevisionNote="Re-released for DXP Platform.", Published=8-Jun-2000, Publisher="Altium Limited"
  R1 R2 R4 R5 R6 R7 R8 R9 R11 R12 R13 R14 R15 R16 R17 R18 R19 R20 R27 R29 R30 R32 R38 R41 R45 R48 R51 R53 R54 R55 R56: PackageDescription="Axial Device, Thru-Hole; 2 Leads; 0.4 in Pin Spacing", PackageReference=AXIAL-0.4
R3 R10: library part RES, "R0603"
R21 R22 R23 R24: library part RES2_0805
S1: library part slide_switch
T1: library part PNP, "PNP三极管"
T2: library part 2N3904, "NPN三极管"
U1: "DCDC降压芯片", BOM_JLCPCB Part Class="Basic Part", BOM_Manufacturer=TI, BOM_Manufacturer Part=TPS5430DDAR, BOM_Supplier=LCSC, BOM_Supplier Part=C9864, spicePre=U, spiceSymbolName=TPS5430DDAR
U2 U6: "H桥驱动芯片"
U3 U4: "两路运放芯片"
U5: "线性稳压3.3V"
U9: "单片机", BOM_JLCPCB Part Class="Extended Part", BOM_Manufacturer=GigaDevice, BOM_Manufacturer Part=GD32F450VIT6, BOM_Supplier=LCSC, BOM_Supplier Part=C98441, spicePre=U, spiceSymbolName=GD32F450VIT6
U10: "线性稳压3.3V", BOM_JLCPCB Part Class="Extended Part", BOM_Manufacturer=MICRONE, BOM_Manufacturer Part=ME6212C33M5G, BOM_Supplier=LCSC, BOM_Supplier Part=C81233, spicePre=U, spiceSymbolName=ME6212C33M5G
U11: "单片机"
USB1: Current Rating - Power (Max)=5A, JLCPCB Part Class="Extended Part", LCSC Part Name="Type-C 母座 卧贴", Manufacturer=韩国韩荣, Operating Temperature Range=-30℃~+80℃, Add into BOM=yes, Connector Type=Type-C, Convert to PCB=yes, Datasheet=https://atta.szlcsc.com/upload/public/pdf/source/20210118/C2682493_F440440370DF84A0F7EEFA980F9F119A.pdf, Device=TYPE-C-31-M-31, Gender=母座, Manufacturer Part=TYPE-C-31-M-31, Mounting Style=卧贴, Name=TYPE-C-31-M-31, Number of Contacts=16, Number of Ports=1, Standard=-, Supplier=LCSC, Supplier Footprint=SMD, Supplier Part=C2760486, Symbol=TYPE-C-31-M-31
Y1 Y2: library part XTAL, "贴片无源晶振", LatestRevisionDate=17-Jul-2002, LatestRevisionNote="Re-released for DXP Platform.", Published=8-Jun-2000, Publisher="Altium Limited"
  Y1: PackageDescription="Crystal, Thru-Hole; 2 Leads; Body 3.1 x 8.2 mm (Dia.xH)", PackageReference=R38

## Free pads (board coordinates)
  round 0 hole 125.98: 8(-2224.41,-1141.73) 8(-2224.41,1141.73) 8(2224.41,-1141.73) 8(2224.41,1141.73)

## Via types
v1: diameter 31.5, hole 19.68, Top Layer to Bottom Layer, tented both sides, 415 vias
v2: diameter 24, hole 12, Top Layer to Bottom Layer, 4 vias
v3: diameter 31.5, hole 19.68, Top Layer to Bottom Layer, 1 vias

## Nets (pads, with @x,y where several pads share a name; then routed paths per layer and width w, separated by ;. In a path a pad name is that pad's centre, name@x,y a point inside that pad or via, vN(x,y) a via of type N, cw(c..) or ccw(c..) an arc to the next point about the centre after c; other vN are vias at no path point)
5V: C3.1 C8.2 CN2.5 CN4.5 CN7.4 L1.1 L2.1 P2.4 R3.2 R7.2 R21.1 R22.2 U5.3 U7.7 | length 10517.6
  Top Layer w10: R7.2@-207.03,542 -205.06,542 -194.31,552.75 -194.31,554.72 -104,645.03 v1(-104,946)
  Top Layer w20: R22.2@-1925,555 R21.1@-1841,555 ; U7.7@-1864,658 -1864,632.39 -1841,609.39 R21.1@-1841,555 ; v1(-1559,516) -1559,451.2 -1437.72,329.92 C3.1@-1391.46,329.92 ; v1(-1471,664) -1471,592 -1295.03,416.03 v1(-1295.03,329.92) ; C3.1@-1345.85,329.92 -1337.94,322.01 -1337.94,298.94 -1258,219 -1070,219 v1(-975,124) ; v1@-1291.11,326 v1(-1295.03,329.92) ; L1.1@-1147.04,123.52 -1177.01,153.49 -1264.49,153.49 -1393,282 -1393,328.38 C3.1@-1391.46,329.92 ; C8.2@-109.16,1014.2 -106.2,1011.24 v1@-106.2,948.2 ; U5.3@13.84,951.51 10.54,948.2 -101.8,948.2 v1(-104,946) -137,946 -153.72,962.72 -153.72,1116.28 -98,1172 480.36,1172 CN7.4@615.37,1037 ; R21.1@-1841,555 -1841,553.03 -1810.25,522.28 -1749.72,522.28 -1700.65,571.35 -1700.65,604.15 -1671.3,633.5 L2.1@-1626,633.5 -1580.7,633.5 -1551.35,604.15 -1551.35,598.85 -1391.46,438.96 C3.1@-1391.46,329.92 ; C3.1@-1391.46,329.92 v1(-1295.03,329.92)
  Top Layer w30: R3.2@-1361.16,123.52 -1147.04,123.52 -1130.39,123.52 L1.1@-1130,123.13
  Bottom Layer w20: v1(-1559,516) -1500,575 -1500,966 -1238,1228 -320,1228 -104,1012 v1(-104,946) ; v1(-1471,664) -1471,881 -1248,1104 -972.64,1104 CN2.5@-907.64,1169 ; v1(-975,124) -798,-53 -798,-412 -611,-599 -281,-599 ; CN4.5@-605.42,-1175 -558.93,-1221.5 -307.5,-1221.5 -177,-1091 -177,-703 -281,-599 ; P2.4@497,-599 -281,-599
12V: C12.1 D1.2 D3.2 D4.2 D5.2 D6.1 R12.2 R24.1 U2.2 U2.7 U2.12 U6.2 U6.7 U6.12 | length 7405.5
  Top Layer w10: U2.7@-632.52,292.61 -632.52,220.05 -616.31,203.85 v1(-616.31,198.03) ; R12.2@-452,92.11 -451,93.11 v1(-451,146)
  Top Layer w20: R24.1@-2137,790.86 -2135.03,790.86 -2004,921.89 -2004,1088 -1935,1157 -1702,1157 -1655,1110 C12.1@-1655,1037.91 ; C12.1@-1666,1030 -1655,1030 -1631.47,1030 -1619.74,1030 -1611.83,1022.09 -1611.83,1018.83 -1372.41,779.41 -1372.41,632.85 -1133,393.44 D1.2@-1133,312.29 -1103.63,282.92 -1029.92,282.92 -952,205 -894.24,205 -882.52,216.72 U2.2@-882.52,292.61 -882.52,369.48 -844,408 -689,408 -632.52,351.52 U2.7@-632.52,292.61 ; C12.1@-1639.39,1030 -1639.39,982.39 -1428,771 -1428,617 -1220,409 v1(-1220,291) ; D5.2@-1133,-482.71 -1025.75,-482.71 -923.24,-380.2 -886.2,-380.2 v1(-884,-378) ; U6.7@-882.52,-281.92 -883.21,-282.61 -883.21,-377.21 v1(-884,-378) ; U6.12@-782.52,-502.39 -782.52,-562.48 v1(-748,-597) ; v1(-757,598) -732.52,573.52 U2.12@-732.52,513.08 ; -633,352 -474,511 -394.11,511 D3.2@-376.5,493.39 -394.82,475.08 v1(-394.82,418.5) ; v1(-379,-218) -379,-299.11 D4.2@-376.5,-301.61 -459.27,-301.61 -540.22,-220.66 -604.73,-220.66 -632.52,-248.45 U6.2@-632.52,-281.92 -632.52,-373 -672.26,-412.75 -752.36,-412.75 -787.11,-378 v1(-884,-378)
  Bottom Layer w10: v1(-616.31,198.03) -564.28,146 v1(-451,146)
  Bottom Layer w20: v1(-1220,291) -1038,291 -529,-218 v1(-379,-218) ; v1(-884,-378) -884,-461 v1(-748,-597) ; v1(-757,598) -577.5,418.5 v1(-394.82,418.5)
ADC0_IN4: U4.1 U4.2 U9.29 | length 2629.6
  Top Layer w10: v1(-771,126) -771,26.11 U4.2@-770.96,26.06 ; v1(692,-154) 935.53,89.53 U9.29@935.53,161.73
  Bottom Layer w10: v1(-771,126) -770.25,125.25 -770.25,95.25 -677,2 -482,2 -169,315 218,315 274,259 308,225 308,-155 348.75,-195.75 650.25,-195.75 v1(692,-154)
ADC0_IN5: U4.6 U4.7 U9.30 | length 2495.7
  Top Layer w10: v1(-665,34) -665,1.03 -642.5,-21.47 -580.51,-21.47 U4.6@-578.04,-23.94 U4.7@-578.04,26.06 ; v1(646.28,-160.59) 646.28,-159.72 860,54 862.21,54 915.84,107.62 U9.30@915.84,161.73
  Bottom Layer w10: v1(-665,34) -477,34 -175,336 228,336 329,235 329,-143 366.75,-180.75 626.13,-180.75 v1(646.28,-160.59)
ADC0_IN6: U3.1 U3.2 U9.31 | length 1334.4
  Top Layer w10: v1(-73,561) -73,519.54 U3.1@-72.46,519 U3.2@-72.46,469 ; v1(771,69) 856,69 896.16,109.16 U9.31@896.16,161.73
  Bottom Layer w10: v1(-73,561) 279,561 v1(771,69)
ADC0_IN7: U3.6 U3.7 U9.32 | length 1218.3
  Top Layer w10: v1(28,470) 28.5,469.5 119.96,469.5 U3.7@120.46,469 U3.6@120.46,419 ; v1(720,69) 748,97 850,97 876.12,123.12 876.12,161.38 U9.32@876.47,161.73
  Bottom Layer w10: v1(28,470) 319,470 v1(720,69)
ADC0_IN10: U9.15
ADC0_IN11: U9.16
ADC0_IN12: U9.17
ADC0_IN13: U9.18
BAT1+: CN1.3 CN5.2 | length 526.7
  Bottom Layer w60: CN1.3@-2121,-684.78 -2118.92,-686.86 -1982.14,-686.86 -1741.57,-927.43 -1741.57,-973.43 CN5.2@-1741,-974
BAT2+: CN1.2 CN5.3 | length 830.3
  Bottom Layer w60: CN1.2@-2121,-783.22 -2037.07,-783.22 -1987,-833.29 -1987,-1053.85 -1951.85,-1089 -1676.15,-1089 -1641,-1053.85 CN5.3@-1641,-974
BAT+: CN1.1 CN5.4 D11.1 S1.1 | length 1244.6
  Top Layer w60: CN1.1@-2121,-881.63 -1992.08,-881.63 D11.1@-1935,-824.55 ; S1.1@-1757.8,-328.13 -1768.91,-339.25 -1757.8,-350.37 -1757.8,-647.35 D11.1@-1935,-824.55 ; CN5.4@-1541,-974 -1690.45,-824.55 D11.1@-1935,-824.55
DEBUG_RXD: U9.93 U11.12 | length 1373.1
  Top Layer w10: U9.93@856.79,-432.75 856.89,-432.86 856.89,-529.68 897.21,-570 v1(1350,-570) ; U11.12@2011.27,-539.32 2031.59,-539.32 2050.27,-558 v1(2053,-558)
  Bottom Layer w10: v1(1350,-570) 1355.82,-570 1366.57,-580.75 2030.25,-580.75 v1(2053,-558)
DEBUG_TXD: U9.92 U11.13 | length 1533.5
  Top Layer w10: U9.92@837.1,-432.75 837.44,-433.1 837.44,-531.44 893,-587 1289.69,-587 1298.44,-595.75 v1(1304.25,-595.75) ; U11.13@2070.32,-480.27 2109.27,-480.27 v1(2128,-499)
  Bottom Layer w10: v1(1304.25,-595.75) 2051.67,-595.75 2093.78,-553.64 2126.46,-520.95 2126.46,-500.54 v1(2128,-499)
GD3.3V: C7.1 C13.2 C14.2 C21.2 C27.2 C28.2 C29.2 C30.2 C31.2 C32.2 C33.2 D7.1 D7.2 D7.3 FPC1.7 R15.2 R34.2 R35.2 R36.2 R38.1 R46.1 R48.2 R54.2 R55.2 U3.8 U4.8 U5.2 U5.4 U8.1 U8.8 U8.13 U9.6 U9.11 U9.19 U9.21 U9.22 U9.28 U9.50 U9.75 U9.100 U13.12 | length 14654.4
  Top Layer w10: U8.1@-39.37,-62.01 -39.37,-109.37 v1(-89,-159) 88,-159 121,-126 121,-39 105.62,-23.62 U8.8@62.01,-23.62 ; U8.13@39.37,62.01 39.37,114.37 v1(83,158) 122.6,158 272,307.4 ; 363.7,329.7 429.51,263.89 C28.2@522,263.89 522.14,263.75 U9.50@522.14,161.73 ; 386,367 808,367 876,299 v1(876,236) ; 386,392 824.92,392 953.03,263.89 C29.2@955,263.89 955.21,263.68 U9.28@955.21,161.73 ; v1(428,-445) 360,-445 344,-429 C27.2@344,-400.11 407.15,-400.11 435.53,-371.73 U9.75@461.12,-371.73 ; v1(992,-507) 994.23,-504.77 U9.100@994.23,-446.79 ; U9.100@994.58,-432.75 994.58,-446.79 995.41,-447.63 C33.2@1201.45,-447.63 C32.2@1201.45,-362.26 1191.51,-352.32 1191.51,-325.51 v1@1118.26,-252.26 ; U9.6@1055.6,-273.31 1096.69,-273.31 v1@1116.34,-253.66 ; U9.11@1055.6,-174.88 1108.88,-174.88 1118,-184 v1@1118,-252 ; U9.19@1055.6,-17.4 1055.8,-17.2 v1@1122,-17.2 ; U9.22@1077,41.66 1110.34,41.66 1122,30 v1(1122,-14) ; v1(1200,-881) R54.2@1260.09,-881 ; R55.2@1278.34,156.53 1278.34,154.57 v1@1312.79,120.11 ; v1(1396,-879) 1398,-881 R48.2@1595.09,-881
  Top Layer w15: -320,235 -320,-183 -182.5,-320.5 165.5,-320.5 200,-355 200,-456 379,-635 379,-777 330.77,-825.23 FPC1.7@183.49,-825.23 112.93,-825.23 90.97,-847.19 R46.1@89,-847.19 80.75,-855.43 64.57,-855.43 25.95,-894.05 8.25,-894.05 C21.2@0,-902.3 -1.97,-902.3 C21.2@-10.22,-894.05
  Top Layer w20: U4.8@-578.04,76.06 -577.49,76.06 -574,79.55 -574,152 -529,197 -358,197 -320,235 -247.6,307.4 272,307.4 341.4,307.4 363.7,329.7 386,352 386,367 386,392 386,714 366.08,733.92 C7.1@273.8,733.92 ; U5.2@13.84,1042.06 U5.4@257.94,1042.06 ; U3.8@120.46,519 153.84,519 159.67,524.83 159.67,526.28 171.39,538 247,538 R15.2@251,542 ; R15.2@249.03,542 C7.1@249.03,726.01 ; v1(311,795) 308.8,792.8 308.8,768.92 C7.1@273.8,733.92 ; R38.1@382,1069.31 285.19,1069.31 U5.4@257.94,1042.06 ; v1(982.81,31.81) 983,32 1077,32 ; v1(1151,390) 1152.19,391.19 1221.42,391.19 C31.2@1222.62,392.38 C30.2@1222.62,470.13 1222.62,692.62 1314.97,784.97 D7.3@1456.95,784.97 D7.2@1516,784.97 D7.1@1569.06,784.97 ; D7.1@1575.06,777.1 D7.1@1575.06,784.97 1575.12,785.04 1616.96,785.04 1667,735 v1(1667,333) ; U5.4@257.94,1042.06 257.94,741.83 250.03,733.92 C7.1@273.8,733.92
  Bottom Layer w10: R35.2@-78.13,-83.66 -78.13,-142.31 -89,-153.18 v1(-89,-159) ; R36.2@-78.13,-0.8 R34.2@-78.13,80.09 ; C13.2@-27.86,-161.46 -30.32,-159 v1(-89,-159) ; v1(83,158) 28.51,158 -47.43,82.06 R34.2@-78.13,82.06 R34.2@-78.13,80.09 ; v1(428,-445) 930,-445 v1(992,-507) 992,-673 v1(1200,-881) 1201,-880 1395,-880 v1(1396,-879) ; v1@882,230.14 882,132.63 v1(982.81,31.81) ; v1(1116.6,-253.92) 1116.6,-19.4 v1(1122,-14) 1122,62 1176,116 v1(1326,116) ; v1(-89,-159) -167,-159 -206,-120 -206,12 -181,37 -121.22,37 R34.2@-78.13,80.09
  Bottom Layer w20: v1(311,795) 311,1030 394,1113 957,1113 1038,1032 1038,503 v1(1151,390) ; v1(1667,333) 1670.11,333 1674.5,337.39 U13.12@1800.87,337.39
GD_SWCLK: R47.1 U9.76 | length 1062.4
  Top Layer w10: U9.76@522.14,-432.75 522.48,-433.1 522.48,-546.48 600,-624 1407.17,-624 1428.2,-602.97 R47.1@1428.2,-601
GD_SWDIO: R50.1 U9.72 | length 1401.2
  Top Layer w10: U9.72@461.12,-312.68 461.46,-313.03 506.03,-313.03 516,-323 516,-378.5 502,-392.5 502,-549 592,-639 1439.14,-639 1457.56,-620.58 1457.56,-554.33 1428.2,-524.97 R50.1@1428.2,-523